# Altium PCB PCB2.PcbDoc
Units mil, origin at the board's own origin, x right, y up, seen from the top; angles counter-clockwise.
Board outline 6000 x 4000 mil, 2 copper layers (Top Layer, Bottom Layer); 219 components, 57 nets, 641 pads, 0 vias.
Unrouted connection lines stored in the file: 389.
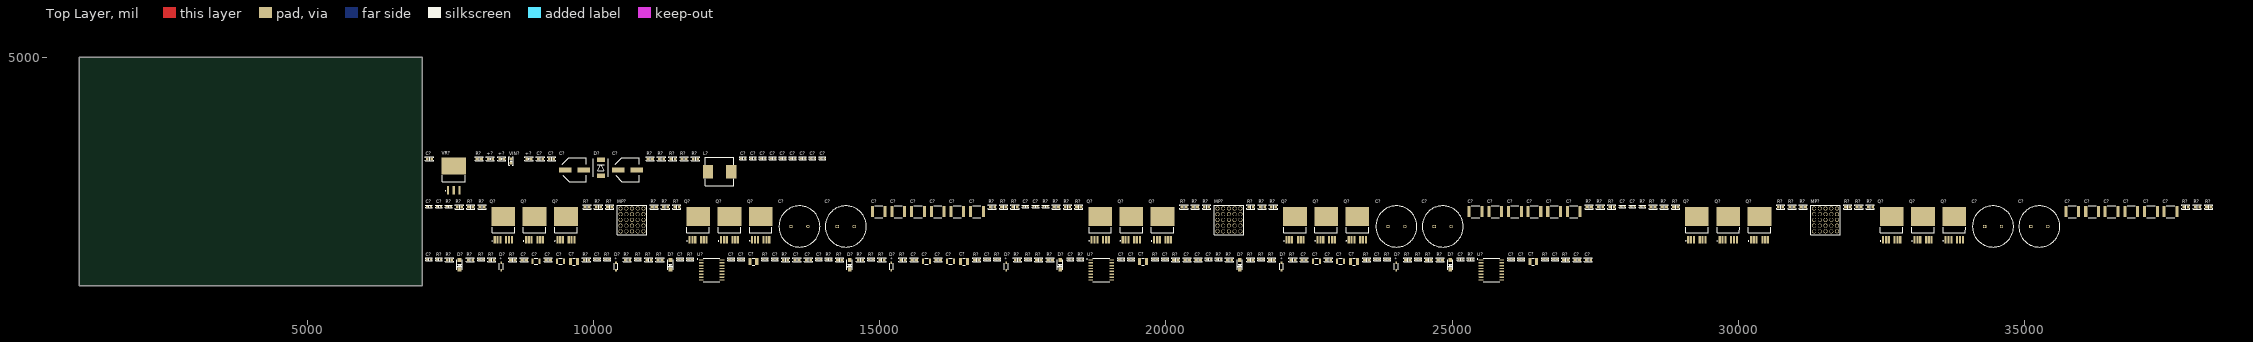
[diagram p0: Top Layer view]
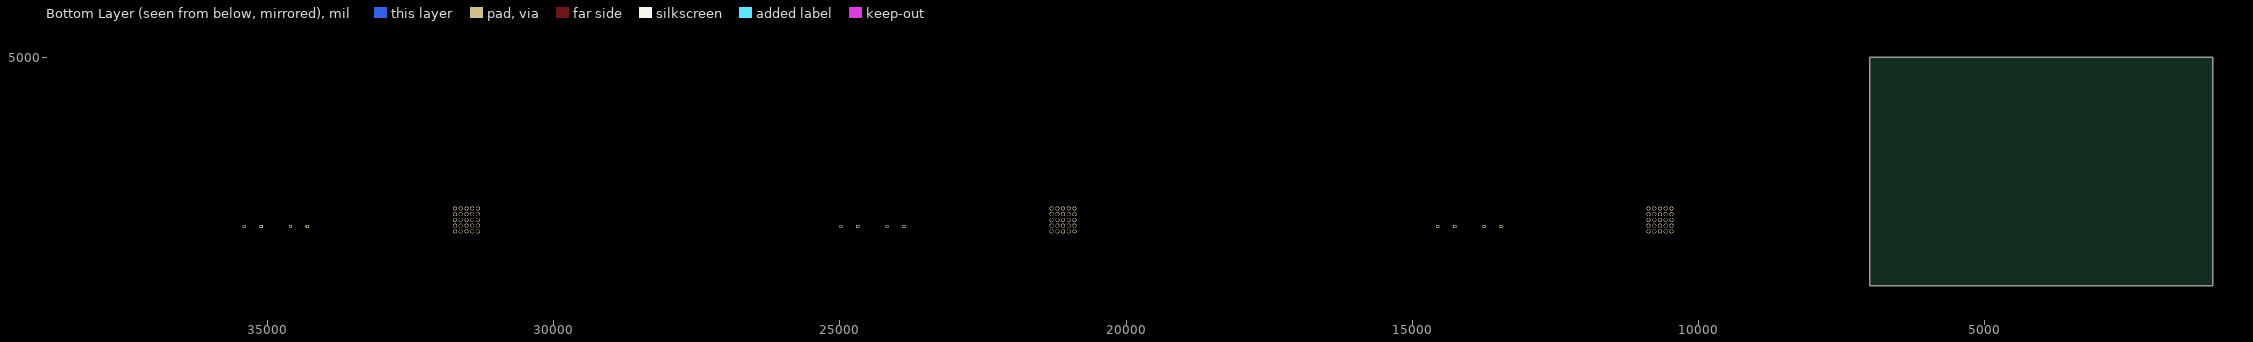
[diagram p1: Bottom Layer view, seen from below]

## Layer stack, top to bottom
Top Solder: solder mask 0.4, Solder Resist, Dk 3.5
Top Layer: signal copper 1.4
Dielectric 1: dielectric 12.6, FR-4, Dk 4.8
Bottom Layer: signal copper 1.4
Bottom Solder: solder mask 0.4, Solder Resist, Dk 3.5

## Board outline
1000,1000 7000,1000 7000,5000 1000,5000

## Design rules (kind name [scope] priority, off if disabled: settings)
Clearance [All] p1: gap=10 ignorepadtopadclearanceinfootprint=FALSE
PolygonConnect [All] p1: connectstyle=Relief reliefconductorwidth=10 reliefentries=4 polygonreliefangle="90 Angle" airgapwidth=10
RoutingVias [All] p1: holewidth=28 width=50 viastyle="Through Hole" minholewidth=28 minwidth=50 maxholewidth=28 maxwidth=50
SolderMaskExpansion [All] p1: expansion=4 istentingtop=FALSE
SupplyNets "Schematic Supply Nets" [InNet('GND')] p1: voltage=0.000
Width [All] p1: maxlimit=10 minlimit=10 preferedwidth=10
30 further rules are at their usual default settings.

## Classes and differential pairs
component class Regulators: +? C? D? L? R? U? VIN? VR?
component class Power: C? IC? MP? Q? R?
component class Driver: C? D? R? U?

## Components (designator, comment, footprint, x,y, rotation, side; value= is the part's Value field where it differs from the comment)
+? "Green" 0805LED 8190,3220 r0 top
+? "Green" 0805LED 8390,3220 r0 top
+? "Green" 0805LED 8865,3220 r0 top
C? "220nF 50V" 0805_CAP 22840,1455 r0 top value="100nF 16V"
C? "10uF Tantalum" CAPPC3528X210N 23285,1425 r0 top
C? "1uF 50V" 0805_CAP 27190,1455 r0 top value="100nF 16V"
C? "1uF 50V" 0603_CAP 19390,1465 r0 top value="1uF 16V"
C? "100nF 50V" 0805_CAP 13750,1455 r0 top value="100nF 16V"
C? "10uF 50V" WCAP-CSGP_1210_L3.2W2.5H0.95 23050,1430 r0 top
C? "1uF Tantalum" CAPPC3528X210N 19600,1425 r0 top
C? "100nF 50V" 0603_CAP 19220,1465 r0 top value="1uF 16V"
C? "100nF 50V" 0603_CAP 26035,1465 r0 top value="1uF 16V"
C? "10uF 50V" WCAP-CSGP_1210_L3.2W2.5H0.95 8990,1430 r0 top
C? "1uF 50V" 0805_CAP 13550,1455 r0 top value="100nF 16V"
C? "1uF 50V" 0603_CAP 12575,1465 r0 top value="1uF 16V"
C? "220nF 50V" 0805_CAP 9200,1455 r0 top value="100nF 16V"
C? "220pF 50V" 0603_CAP 23695,1465 r0 top value="1uF 16V"
C? "4.7uF" WCAP-CSGP_2220_L5.7W5H2.8 26100,2300 r0 top
C? "4.7uF" WCAP-CSGP_2220_L5.7W5H2.8 16695,2300 r0 top
C? "1uF Tantalum" CAPPC3528X210N 26420,1425 r0 top
C? "10uF 50V" WCAP-CSGP_1210_L3.2W2.5H0.95 15810,1430 r0 top
C? "100nF 50V" 0805_CAP 8780,1455 r0 top value="100nF 16V"
C? "2200pF 50V" 0603_CAP 18330,1465 r0 top value="1uF 16V"
C? "10uF 50V" WCAP-CSGP_1210_L3.2W2.5H0.95 16230,1430 r0 top
C? "100nF 50V" 0805_CAP 15600,1455 r0 top value="100nF 16V"
C? "1uF Tantalum" CAPPC3528X210N 12785,1425 r0 top
C? "10uF 50V" WCAP-CSGP_1210_L3.2W2.5H0.95 9415,1430 r0 top
C? "10uF Tantalum" CAPPC3528X210N 16470,1425 r0 top
C? "100nF 50V" 0805_CAP 20565,1455 r0 top value="100nF 16V"
C? "220pF 50V" 0603_CAP 13165,1465 r0 top value="1uF 16V"
C? "220nF 50V" 0805_CAP 16020,1455 r0 top value="100nF 16V"
C? "100nF 50V" 0603_CAP 12400,1465 r0 top value="1uF 16V"
C? "100nF 50V" 0805_CAP 27385,1455 r0 top value="100nF 16V"
C? "2200pF 50V" 0603_CAP 11510,1465 r0 top value="1uF 16V"
C? "100nF 50V" 0805_CAP 22415,1455 r0 top value="100nF 16V"
C? "220pF 50V" 0603_CAP 20750,1465 r0 top value="1uF 16V"
C? "220pF 50V" 0603_CAP 13935,1465 r0 top value="1uF 16V"
C? "2200pF 50V" 0603_CAP 25150,1465 r0 top value="1uF 16V"
C? "1uF 50V" 0805_CAP 20370,1455 r0 top value="100nF 16V"
C? "220pF 50V" 0603_CAP 26805,1465 r0 top value="1uF 16V"
C? "220pF 50V" 0603_CAP 7115,1465 r0 top value="1uF 16V"
C? "1uF 50V" 0603_CAP 26210,1465 r0 top value="1uF 16V"
C? "220pF 50V" 0603_CAP 10055,1465 r0 top value="1uF 16V"
C? "220pF 50V" 0603_CAP 19985,1465 r0 top value="1uF 16V"
C? "10uF Tantalum" CAPPC3528X210N 9650,1425 r0 top
C? "220pF 50V" 0603_CAP 16875,1465 r0 top value="1uF 16V"
C? "10uF 50V" WCAP-CSGP_1210_L3.2W2.5H0.95 22630,1430 r0 top
C? "100nF 100V" 0805_CAP 9260,3220 r0 top value="100nF 25V"
C? "470uF 100V" CAPAE1030X1060N 9660,3030 r0 top
C? "10uF 25V" 0603_CAP 13995,3230 r0 top value="1uF 16V"
C? "10uF 25V" 0603_CAP 13125,3230 r0 top value="1uF 16V"
C? "100nF 25V" 0603_CAP 12780,3230 r0 top value="1uF 16V"
C? "470uF 200V" CAPPRD750W80D1825H4150 23880,2040 r0 top
C? "4.7uF" WCAP-CSGP_2220_L5.7W5H2.8 16350,2300 r0 top
C? "4.7uF" WCAP-CSGP_2220_L5.7W5H2.8 36530,2300 r0 top
C? "1uF 16V" 0603_CAP 7290,2390 r0 top
C? "470uF 200V" CAPPRD750W80D1825H4150 24690,2040 r0 top
C? "470uF 200V" CAPPRD750W80D1825H4150 34310,2040 r0 top
C? "100nF 25V" 0603_CAP 12950,3230 r0 top value="1uF 16V"
C? "220uF 50V" CAPAE1030X1060N 10585,3030 r0 top
C? "10uF 25V" 0603_CAP 13820,3230 r0 top value="1uF 16V"
C? "10uF 25V" 0603_CAP 13300,3230 r0 top value="1uF 16V"
C? "100nF 25V" 0603_CAP 12605,3230 r0 top value="1uF 16V"
C? "100nF 25V" 0805_CAP 7125,3220 r0 top
C? "680pF 25V" 0805_CAP 9065,3220 r0 top
C? "10uF 25V" 0603_CAP 13475,3230 r0 top value="1uF 16V"
C? "10uF 25V" 0603_CAP 13650,3230 r0 top value="1uF 16V"
C? "4.7uF" WCAP-CSGP_2220_L5.7W5H2.8 16010,2300 r0 top
C? "4.7uF" WCAP-CSGP_2220_L5.7W5H2.8 15665,2300 r0 top
C? "470uF 200V" CAPPRD750W80D1825H4150 13445,2040 r0 top
C? "4.7uF" WCAP-CSGP_2220_L5.7W5H2.8 26785,2300 r0 top
C? "100nF 25V" 0603_CAP 27980,2390 r0 top value="1uF 16V"
C? "4.7uF" WCAP-CSGP_2220_L5.7W5H2.8 35845,2300 r0 top
C? "4.7uF" WCAP-CSGP_2220_L5.7W5H2.8 27130,2300 r0 top
C? "1uF 16V" 0603_CAP 17720,2390 r0 top
C? "4.7uF" WCAP-CSGP_2220_L5.7W5H2.8 36875,2300 r0 top
C? "4.7uF" WCAP-CSGP_2220_L5.7W5H2.8 37560,2300 r0 top
C? "100nF 25V" 0603_CAP 17545,2390 r0 top value="1uF 16V"
C? "4.7uF" WCAP-CSGP_2220_L5.7W5H2.8 36190,2300 r0 top
C? "4.7uF" WCAP-CSGP_2220_L5.7W5H2.8 37220,2300 r0 top
C? "100nF 25V" 0603_CAP 7115,2390 r0 top value="1uF 16V"
C? "4.7uF" WCAP-CSGP_2220_L5.7W5H2.8 15320,2300 r0 top
C? "4.7uF" WCAP-CSGP_2220_L5.7W5H2.8 25410,2300 r0 top
C? "4.7uF" WCAP-CSGP_2220_L5.7W5H2.8 14980,2300 r0 top
C? "4.7uF" WCAP-CSGP_2220_L5.7W5H2.8 26440,2300 r0 top
C? "470uF 200V" CAPPRD750W80D1825H4150 14255,2040 r0 top
C? "4.7uF" WCAP-CSGP_2220_L5.7W5H2.8 25755,2300 r0 top
C? "1uF 16V" 0603_CAP 28155,2390 r0 top
C? "470uF 200V" CAPPRD750W80D1825H4150 35120,2040 r0 top
D? "SS14" SOD3715X145N 15200,1340 r90 top
D? "B0530W-7-F" DO-214AC 21290,1370 r90 top
D? "SS14" SOD3715X145N 17205,1340 r90 top
D? "SS14" SOD3715X145N 8380,1340 r90 top
D? "SS14" SOD3715X145N 10385,1340 r90 top
D? "B0530W-7-F" DO-214AC 7650,1370 r90 top
D? "B0530W-7-F" DO-214AC 24970,1370 r90 top
D? "B0530W-7-F" DO-214AC 18150,1370 r90 top
D? "SS36-HT" DO-214AB 10120,3065 r90 top
D? "B0530W-7-F" DO-214AC 11335,1370 r90 top
D? "SS14" SOD3715X145N 22020,1340 r90 top
D? "SS14" SOD3715X145N 24025,1340 r90 top
D? "B0530W-7-F" DO-214AC 14470,1370 r90 top
L? "47uH 2A" "BOURNS SRR1280" 12195,3000 r0 top
MP? "M6 x 10mm" "7461098_chemical surface" 21100,2155 r0 top
MP? "M6 x 10mm" "7461098_chemical surface" 10665,2155 r0 top
MP? "M6 x 10mm" "7461098_chemical surface" 31530,2155 r0 top
Q? "FDB0260N1007L" FDB0260N1007L 29830,2010 r0 top
Q? "FDB0260N1007L" FDB0260N1007L 12370,2010 r0 top
Q? "FDB0260N1007L" FDB0260N1007L 30375,2010 r0 top
Q? "FDB0260N1007L" FDB0260N1007L 8415,2010 r0 top
Q? "FDB0260N1007L" FDB0260N1007L 32685,2010 r0 top
Q? "FDB0260N1007L" FDB0260N1007L 29280,2010 r0 top
Q? "FDB0260N1007L" FDB0260N1007L 19940,2010 r0 top
Q? "FDB0260N1007L" FDB0260N1007L 19395,2010 r0 top
Q? "FDB0260N1007L" FDB0260N1007L 12915,2010 r0 top
Q? "FDB0260N1007L" FDB0260N1007L 11820,2010 r0 top
Q? "FDB0260N1007L" FDB0260N1007L 22800,2010 r0 top
Q? "FDB0260N1007L" FDB0260N1007L 22255,2010 r0 top
Q? "FDB0260N1007L" FDB0260N1007L 18850,2010 r0 top
Q? "FDB0260N1007L" FDB0260N1007L 8960,2010 r0 top
Q? "FDB0260N1007L" FDB0260N1007L 23345,2010 r0 top
Q? "FDB0260N1007L" FDB0260N1007L 9510,2010 r0 top
Q? "FDB0260N1007L" FDB0260N1007L 33235,2010 r0 top
Q? "FDB0260N1007L" FDB0260N1007L 33780,2010 r0 top
R? "51 Ohms" 0603_RES 8030,1465 r0 top
R? "10k Ohms" 0603_RES 10230,1465 r0 top
R? "10k Ohms" 0805_RES 11155,1455 r0 top value="1k Ohms"
R? "109 Ohms" 0805_RES 10960,1455 r0 top value="1k Ohms"
R? "51 Ohms" 0603_RES 10770,1465 r0 top
R? "10k Ohms" 0603_RES 25325,1465 r0 top
R? "10k Ohms" 0603_RES 20925,1465 r0 top
R? "10k Ohms" 0603_RES 18505,1465 r0 top
R? "51 Ohms" 0603_RES 19810,1465 r0 top
R? "10k Ohms" 0805_RES 24795,1455 r0 top value="1k Ohms"
R? "0 Ohms" 0805_RES 14660,1455 r0 top value="1k Ohms"
R? "76.5 Ohms" 0805_RES 24225,1455 r0 top value="1k Ohms"
R? "109 Ohms" 0805_RES 9870,1455 r0 top value="1k Ohms"
R? "109 Ohms" 0805_RES 17775,1455 r0 top value="1k Ohms"
R? "10k Ohms" 0603_RES 11685,1465 r0 top
R? "3 Ohms" 0805_RES 20710,2380 r0 top value="1k Ohms"
R? "0 Ohms" 0805_RES 7475,1455 r0 top value="1k Ohms"
R? "76.5 Ohms" 0805_RES 8580,1455 r0 top value="1k Ohms"
R? "10k Ohms" 0805_RES 15035,1455 r0 top value="1k Ohms"
R? "51 Ohms" 0603_RES 17590,1465 r0 top
R? "2 Ohms" 0805_RES 20170,1455 r0 top value="1k Ohms"
R? "10k Ohms" 0805_RES 17975,1455 r0 top value="1k Ohms"
R? "51 Ohms" 0603_RES 21665,1465 r0 top
R? "76.5 Ohms" 0805_RES 17405,1455 r0 top value="1k Ohms"
R? "51 Ohms" 0603_RES 14845,1465 r0 top
R? "0 Ohms" 0805_RES 14295,1455 r0 top value="1k Ohms"
R? "10k Ohms" 0805_RES 8215,1455 r0 top value="1k Ohms"
R? "76.5 Ohms" 0805_RES 22220,1455 r0 top value="1k Ohms"
R? "10k Ohms" 0805_RES 21850,1455 r0 top value="1k Ohms"
R? "109 Ohms" 0805_RES 16690,1455 r0 top value="1k Ohms"
R? "51 Ohms" 0603_RES 12990,1465 r0 top
R? "109 Ohms" 0805_RES 24595,1455 r0 top value="1k Ohms"
R? "76.5 Ohms" 0805_RES 15400,1455 r0 top value="1k Ohms"
R? "10k Ohms" 0603_RES 23870,1465 r0 top
R? "2 Ohms" 0805_RES 26990,1455 r0 top value="1k Ohms"
R? "10k Ohms" 0603_RES 17050,1465 r0 top
R? "0 Ohms" 0805_RES 21480,1455 r0 top value="1k Ohms"
R? "51 Ohms" 0603_RES 24410,1465 r0 top
R? "10k Ohms" 0603_RES 14105,1465 r0 top
R? "0 Ohms" 0805_RES 21110,1455 r0 top value="1k Ohms"
R? "10k Ohms" 0603_RES 7290,1465 r0 top
R? "0 Ohms" 0805_RES 7840,1455 r0 top value="1k Ohms"
R? "76.5 Ohms" 0805_RES 10585,1455 r0 top value="1k Ohms"
R? "109 Ohms" 0805_RES 23510,1455 r0 top value="1k Ohms"
R? "51 Ohms" 0603_RES 26630,1465 r0 top
R? "2 Ohms" 0805_RES 13350,1455 r0 top value="1k Ohms"
R? "3 Ohms" 0805_RES 7650,2380 r0 top value="1k Ohms"
R? "3 Ohms" 0805_RES 27595,2380 r0 top value="1k Ohms"
R? "3 Ohms" 0805_RES 10275,2380 r0 top value="1k Ohms"
R? "3 Ohms" 0805_RES 11250,2380 r0 top value="1k Ohms"
R? "3 Ohms" 0805_RES 20510,2380 r0 top value="1k Ohms"
R? "3 Ohms" 0805_RES 11450,2380 r0 top value="1k Ohms"
R? "3 Ohms" 0805_RES 28515,2380 r0 top value="1k Ohms"
R? "3 Ohms" 0805_RES 21485,2380 r0 top value="1k Ohms"
R? "3 Ohms" 0805_RES 37830,2380 r0 top value="1k Ohms"
R? "3 Ohms" 0805_RES 31920,2380 r0 top value="1k Ohms"
R? "3 Ohms" 0805_RES 18475,2380 r0 top value="1k Ohms"
R? "1k Ohms" 0603_RES 17895,2390 r0 top
R? "20K Ohms" 0805_RES 11775,3220 r0 top
R? "1k Ohms" 0805_RES 7995,3220 r0 top
R? "2k2 Ohms" 0805_RES 11180,3220 r0 top
R? "10K Ohms" 0805_RES 11380,3220 r0 top
R? "3 Ohms" 0805_RES 17360,2380 r0 top value="1k Ohms"
R? "3 Ohms" 0805_RES 27795,2380 r0 top value="1k Ohms"
R? "1k Ohms" 0603_RES 28330,2390 r0 top
R? "11k Ohms" 0805_RES 10985,3220 r0 top
R? "22K Ohms" 0805_RES 11575,3220 r0 top
R? "3 Ohms" 0805_RES 38230,2380 r0 top value="1k Ohms"
R? "3 Ohms" 0805_RES 11055,2380 r0 top value="1k Ohms"
R? "3 Ohms" 0805_RES 32315,2380 r0 top value="1k Ohms"
R? "1k Ohms" 0603_RES 7460,2390 r0 top
R? "3 Ohms" 0805_RES 10080,2380 r0 top value="1k Ohms"
R? "3 Ohms" 0805_RES 9880,2380 r0 top value="1k Ohms"
R? "3 Ohms" 0805_RES 30945,2380 r0 top value="1k Ohms"
R? "3 Ohms" 0805_RES 28910,2380 r0 top value="1k Ohms"
R? "3 Ohms" 0805_RES 8045,2380 r0 top value="1k Ohms"
R? "3 Ohms" 0805_RES 18280,2380 r0 top value="1k Ohms"
R? "3 Ohms" 0805_RES 7845,2380 r0 top value="1k Ohms"
R? "3 Ohms" 0805_RES 27400,2380 r0 top value="1k Ohms"
R? "3 Ohms" 0805_RES 18080,2380 r0 top value="1k Ohms"
R? "3 Ohms" 0805_RES 20315,2380 r0 top value="1k Ohms"
R? "3 Ohms" 0805_RES 38030,2380 r0 top value="1k Ohms"
R? "3 Ohms" 0805_RES 17165,2380 r0 top value="1k Ohms"
R? "3 Ohms" 0805_RES 16965,2380 r0 top value="1k Ohms"
R? "3 Ohms" 0805_RES 21880,2380 r0 top value="1k Ohms"
R? "3 Ohms" 0805_RES 31140,2380 r0 top value="1k Ohms"
R? "3 Ohms" 0805_RES 21685,2380 r0 top value="1k Ohms"
R? "3 Ohms" 0805_RES 32115,2380 r0 top value="1k Ohms"
R? "3 Ohms" 0805_RES 30745,2380 r0 top value="1k Ohms"
R? "3 Ohms" 0805_RES 28710,2380 r0 top value="1k Ohms"
U? "UCC21520DWR" SOIC127P1030X265-16N 25690,1280 r0 top
U? "UCC21520DWR" SOIC127P1030X265-16N 18870,1280 r0 top
U? "UCC21520DWR" SOIC127P1030X265-16N 12055,1280 r0 top
VIN? "Green" 0805LED 8550,3185 r90 top
VR? "TL783" TL783 7450,2670 r0 top

## Footprints (in the part's own frame and the unit in brackets; to place one, negate y for a bottom-side part, rotate by r counter-clockwise, add the part's x,y. Pads: shape width x height; smd on the part's side, far side on the other; paste and mask are expansions set on the pad)
0603_CAP [mm]
  rect 1x0.95 smd mask+0.08: 1(-0.889,0) 2(0.889,0)
  silkscreen extent -1.52,-0.64 1.52,0.64, body extent -0.8,-0.4 0.8,0.4, height 0.96
0603_RES [mm]
  rect 1x0.95 smd mask+0.08: 1(-0.889,0) 2(0.889,0)
  silkscreen extent -1.52,-0.64 1.52,0.64, body extent -0.85,-0.4 0.85,0.4, height 0.56
0805_CAP [mm]
  rect 1.2x1.4 smd: 1(-1,0) 2(1,0)
  silkscreen extent -1.8,-0.9 1.8,0.9, body extent -1,-0.62 1,0.63, height 0.6
0805_RES [mm]
  rect 1.2x1.4 smd: 1(-1,0) 2(1,0)
  silkscreen extent -1.8,-0.9 1.8,0.9, body extent -1,-0.62 1,0.63, height 0.6
0805LED [mm]
  rect 1.2x1.4 smd: 1(-1,0) 2(1,0)
  silkscreen extent -1.8,-0.9 1.8,0.9, body extent -1.01,-0.62 1.01,0.63, height 1.1
"7461098_chemical surface" [mm] "M6, thread 10mm"
  round 1.8 hole 1.475: 1(-5.08,-5.08) 1(-5.08,-2.54) 1(-5.08,0) 1(-5.08,2.54) 1(-5.08,5.08) 1(-2.54,-5.08) 1(-2.54,-2.54) 1(-2.54,0) 1(-2.54,2.54) 1(-2.54,5.08) 1(0,-5.08) 1(0,-2.54) 1(0,0) 1(0,2.54) 1(0,5.08) 1(2.54,-5.08) 1(2.54,-2.54) 1(2.54,0) 1(2.54,2.54) 1(2.54,5.08) 1(5.08,-5.08) 1(5.08,-2.54) 1(5.08,0) 1(5.08,2.54) 1(5.08,5.08)
  silkscreen extent -6.5,-6.5 6.5,6.5, body extent -6.5,-6.5 6.5,6.5, height 15.5
"BOURNS SRR1280" [mm]
  rect 4.5x6 smd: 1(-5.2,0) 2(5.2,0)
  silkscreen extent -6.4,-6.4 6.4,6.4, body extent -6.25,-6.25 6.25,6.25, height 7.9
CAPAE1030X1060N [mm]
  rect 5.5x2.2 smd: 1(-4.15,0) 2(4.15,0)
  silkscreen extent -5.4,-5.3 5.3,5.3, body extent -5.6,-5.25 5.6,5.25, height 10.6
CAPPC3528X210N [mm]
  rect 1.34x3.02 smd: 1(-1.54,0) 2(1.54,0)
  silkscreen extent -0.55,-1.5 0.55,1.5
CAPPRD750W80D1825H4150 [mm]
  rect 1.5x1.5 / inner round 1.5 / far side rect 1.5x1.5 hole 1: 1(0,0)
  round 1.5 hole 1: 2(7.5,0)
  silkscreen extent -5.37,-9.12 12.88,9.12
DO-214AB [mm]
  rect 2x3.5 smd mask+0.05: 1(-3.6,0) 2(3.6,0)
  silkscreen extent -4,-3.3 4,3.3, body extent -3.95,-2.9 3.95,2.9, height 2.5
DO-214AC [mm]
  rect 1.8x1.7 smd: A(2.05,0) K(-2.05,0)
  silkscreen extent -2.3,-1.2 2.3,1.2, body extent -2.6,-1.36 2.6,1.36, height 2.5
FDB0260N1007L [mm]
  rect 0.95x3.45 smd: 1(-3.81,-5.1) 2(-2.54,-5.1) 3(-1.27,-5.1) 5(1.27,-5.1) 6(2.54,-5.1) 7(3.81,-5.1)
  rect 10.5x8.4 smd: 4(0,5.1)
  silkscreen extent -5,-5.7 5,0.4
SOD3715X145N [mm]
  rect 1.21x0.72 smd: A(1.68,0) C(-1.68,0)
  silkscreen extent -1.35,-0.85 1.35,0.85
SOIC127P1030X265-16N [mm]
  rrect25% 2.06x0.6 smd: 1(-4.64,4.445) 2(-4.64,3.175) 3(-4.64,1.905) 4(-4.64,0.635) 5(-4.64,-0.635) 6(-4.64,-1.905) 7(-4.64,-3.175) 8(-4.64,-4.445) 9(4.64,-4.445) 10(4.64,-3.175) 11(4.64,-1.905) 12(4.64,-0.635) 13(4.64,0.635) 14(4.64,1.905) 15(4.64,3.175) 16(4.64,4.445)
  silkscreen extent -6.4,-5.15 3.75,5.15, body extent -5.15,-5.15 5.15,5.15, height 2.65
TL783 [mm]
  rect 0.99x3.79 smd: 1(0,0) 2(2.54,0) 3(5.08,0)
  rect 10.84x7.62 smd paste-6: 4(2.54,10.88)
  silkscreen extent -2.54,-0.24 7.62,6.76, body extent -2.54,-0.71 7.62,14.53, height 4.83
WCAP-CSGP_1210_L3.2W2.5H0.95 [mm] "Ceramic Capacitors, body 3.2x2.5mm"
  rect 0.9x2.5 smd: 1(-1.55,0) 2(1.55,0)
  silkscreen extent -0.8,-1.35 0.8,1.35, body extent -1.6,-1.25 1.6,1.25, height 0.95
WCAP-CSGP_2220_L5.7W5H2.8 [mm] "Ceramic Capacitors, body 5.70x5.00mm"
  rect 1.35x5 smd: 1(-2.825,0) 2(2.825,0)
  silkscreen extent -1.8,-2.7 1.8,2.7, body extent -2.85,-2.5 2.85,2.5, height 2.8

## Part data
+? +? +? VIN?: library part LED, "0805"
C? C? C? C? C? C? C? C? C? C? C? C? C? C? C?: library part CAP_0805
C? C? C? C? C? C?: library part T495B106K025ATE750, "10ÂµF Molded Tantalum Capacitors 25V 1411 (3528 Metric) 750mOhm @ 100kHz", Package="1411 KEMET", Availability=Unavailable, MF=KEMET, MP=T495B106K025ATE750, Price=None, SnapEDA_Link=https://www.snapeda.com/parts/T495B106K025ATE750/KEMET/view-part/1680496/?ref=snap
C? C? C? C? C? C? C? C? C? C? C? C? C? C? C? C? C? C? C? C? C? C? C? C? C? C? C? C? C? C? C? C? C?: library part CAP_0603, "CL10B105KO8NNNC - MLCC (1608) 0603 1uF 16VDC ±10% X7R"
C? C? C? C? C? C?: library part 885012009019, "WCAP-CSGP Multilayer Ceramic Chip Capacitor, General Purpose, size 1210, NP0, 2.2nF, 50V", Capacitance=2.2nF, Capacitance Tolerance=+/-5%, Case/Size Code=1210, manufacturer="Wurth Elektronik", Max Operating Temperature=125°C, Min Operating Temperature=-55°C, Rated Voltage (DC)=50V, Insulation Resistance=10GΩ, Category="Multilayer Ceramic Chip Capacitors", Ceramic Type=NP0, ComponentLink1Description="Website Link", ComponentLink1URL=https://www.we-online.com/redexpert/article/885012009019?ad, ComponentLink2Description="Datasheet Link", ComponentLink2URL=https://www.we-online.com/redexpert/spec/885012009019?ad, Height=0.95mm, Length=3.2mm, Manufacturer Part Number=885012009019, Match Code=WCAP-CSGP, Mount="Surface Mount", packaging="Tape and Reel", Q Factor=1000, Technical Reference=NP01210222J050DFCT10000, Width=2.5mm
C? C? C? C? C? C? C? C? C? C? C? C? C? C? C? C? C? C?: library part 885012214001, "WCAP-CSGP Multilayer Ceramic Chip Capacitor, General Purpose, size 2220, X7R Class II, 10μF, 100V", Capacitance=10μF, Capacitance Tolerance=+/-20%, Case/Size Code=2220, manufacturer="Wurth Elektronik", Max Operating Temperature=125°C, Min Operating Temperature=-55°C, Rated Voltage (DC)=100V, Insulation Resistance=0.01GΩ, Category="Multilayer Ceramic Chip Capacitors", Ceramic Type="X7R Class II", ComponentLink1Description="Website Link", ComponentLink1URL=https://www.we-online.com/redexpert/article/885012214001?ad, ComponentLink2Description="Datasheet Link", ComponentLink2URL=https://www.we-online.com/redexpert/spec/885012214001?ad, Dissipation Factor=2.5%, Height=2.8mm, Length=5.7mm, Manufacturer Part Number=885012214001, Match Code=WCAP-CSGP, Mount="Surface Mount", packaging="Tape and Reel", Technical Reference=X7R2220106M100DFCT10000, Width=5mm
C? C?: library part CK1H221M-CRG10, "Capacitor Polarised", Manufacturer_Name=SEMTECH, Datasheet Link=https://datasheet.lcsc.com/szlcsc/1810281207_ST-Semtech-CK1H221M-CRG10_C131159.pdf, Height=10.6mm, Manufacturer_Part_Number=CK1H221M-CRG10
C? C? C? C? C? C?: library part UCY2D471MHD, "Aluminum Electrolytic Capacitors - Radial Leaded 470uF 200 Volts 20% AEC-Q200", Manufacturer_Name=Nichicon, Mouser Part Number=647-UCY2D471MHD, Datasheet Link=https://www.mouser.in/datasheet/2/293/e_ucy-1511878.pdf, Geometry.Height=41.5mm, Manufacturer_Part_Number=UCY2D471MHD, Mouser Price/Stock=https://www.mouser.co.uk/ProductDetail/Nichicon/UCY2D471MHD?qs=lub5aoyU9qCCB7JKpUdfUQ%3D%3D
D? D? D? D? D? D?: library part B0530W-7-F, "Diode Schottky 30V 500mA Surface Mount SOD-123", Package="SOD-123 Diodes Inc.", Availability=Unavailable, MF="Diodes Inc.", MP=B0530W-7-F, Price=None, SnapEDA_Link=https://www.snapeda.com/parts/B0530W-7-F/Diodes%20Inc./view-part/272168/?ref=snap
D? D? D? D? D? D?: library part SS14, "Diode Schottky 40 V 1A Surface Mount DO-214AC (SMA)", Package="SMA-2 ON Semiconductor", Check_prices=https://www.snapeda.com/parts/SS14/Onsemi/view-part/?ref=eda, MF="ON Semiconductor", MP=SS14, SnapEDA_Link=https://www.snapeda.com/parts/SS14/Onsemi/view-part/?ref=snap
D?: library part SS36-214AB-HT, "Schottky Diode", ComponentLink1Description=Özdisan, ComponentLink1URL=https://ozdisan.com/guc-yari-iletkenleri/diyotlar-modul-diyotlar-ve-dogrultucular/schottky-diyotlar/SS36-214AB-HT/475999, ComponentLink2Description=Datasheet, ComponentLink2URL=https://cdn.ozdisan.com/ETicaret_Dosya/475999_7494647.pdf, PartNumber=SS36-HT
L?: library part Inductor, "FIXED IND 47UH 2.9A 80 MOHM SMD"
MP? MP? MP?: library part 7461098, "WP-SHFU REDCUBE PRESS-FIT with external thread, L13W13H15.5mm, M6 x 10mm, 250A", manufacturer="Wurth Elektronik", Operating Temperature Max=150°C, Operating Temperature Min=-55°C, Rated Current=250A, Category="REDCUBE PRESS-FIT", ComponentLink1Description="Website Link", ComponentLink1URL=https://www.we-online.com/redexpert/article/7461098?ad, ComponentLink2Description="Datasheet Link", ComponentLink2URL=https://www.we-online.com/redexpert/spec/7461098?ad, Height=15.5mm, Length=13mm, Manufacturer Part Number=7461098, Match Code=WP-SHFU, Material=Brass, Mount="Press Fit", Number of Pins=25, packaging=Bulk, Surface=Tin, Thread Length=10mm, Thread Size=M6, Width=13mm
Q? Q? Q? Q? Q? Q? Q? Q? Q? Q? Q? Q? Q? Q? Q? Q? Q? Q?: "MOSFET 100V TO263 7L JEDEC GREEN EMC", Manufacturer_Name=onsemi, Mouser Part Number=512-FDB0260N1007L, Arrow Part Number=FDB0260N1007L, Arrow Price/Stock=https://www.arrow.com/en/products/fdb0260n1007l/on-semiconductor, Datasheet Link=https://componentsearchengine.com/Datasheets/2/FDB0260N1007L.pdf, Geometry.Height=4.7mm, Manufacturer_Part_Number=FDB0260N1007L, Mouser Price/Stock=https://www.mouser.co.uk/ProductDetail/ON-Semiconductor-Fairchild/FDB0260N1007L?qs=lDZPRidwxxtoCZGWdM7x%2FA%3D%3D
R? R? R? R? R? R? R? R? R? R? R? R? R? R? R? R? R? R?: library part "1k Ohms"
R? R? R? R? R? R? R? R? R? R? R? R? R? R? R? R? R? R? R? R? R? R? R? R? R? R? R? R? R? R? R? R? R? R? R? R? R? R? R? R? R? R? R? R? R? R? R? R? R? R? R? R? R? R? R? R? R? R? R? R? R? R? R? R? R? R? R? R? R?: library part RES_0805, "0805", Power="1/8 W"
U? U? U?: "5.7kVrms, 4A/6A dual-channel isolated gate driver w/ dual input, disable pin, 8V UVLO in DW package", Package="SOIC-16 Texas Instruments", Availability="In Stock", Check_prices=https://www.snapeda.com/parts/UCC21520DWR/Texas+Instruments/view-part/?ref=eda, MF="Texas Instruments", MP=UCC21520DWR, Price=None, Purchase-URL=https://pricing.snapeda.com/search/part/UCC21520DWR/?ref=eda, SnapEDA_Link=https://www.snapeda.com/parts/UCC21520DWR/Texas+Instruments/view-part/?ref=snap
VR?: library part TL783/SMD

## Nets (pads, with @x,y where several pads share a name; then routed paths per layer and width w, separated by ;. In a path a pad name is that pad's centre, name@x,y a point inside that pad or via, vN(x,y) a via of type N, cw(c..) or ccw(c..) an arc to the next point about the centre after c; other vN are vias at no path point)
+3.3V: C?.1@7080,2390 C?.1@17510,2390 C?.1@27945,2390
+5V: C?.1@12724.37,1425 C?.1@19539.37,1425 C?.1@26359.37,1425 C?.2@12435,1465 C?.2@12610,1465 C?.2@13160,3230 C?.2@13335,3230 C?.2@13510,3230 C?.2@13685,3230 C?.2@13855,3230 C?.2@14030,3230 C?.2@19255,1465 C?.2@19425,1465 C?.2@26070,1465 C?.2@26245,1465 R?.1@11140.63,3220 U?.3 U?.8
+12V: C?.2@13589.37,1455 C?.2@13789.37,1455 C?.2@20409.37,1455 C?.2@20604.37,1455 C?.2@27229.37,1455 C?.2@27424.37,1455 R?.2@13389.37,1455 R?.2@20209.37,1455 R?.2@27029.37,1455
+15V: C?.1@10421.61,3030 C?.2@9104.37,3220 C?.2@12640,3230 C?.2@12815,3230 C?.2@12985,3230 L?.2 R?.1@11340.63,3220 R?.2@11024.37,3220 U?.1@25507.32,1455
+45V: C?.1@9496.61,3030 C?.2@7164.37,3220 C?.2@9299.37,3220 R?.1@11735.63,3220 VR?.1 VR?.2 VR?.4
A_DIS: R?.1@26595,1465
A_IN_H: R?.1@24375,1465
A_IN_L: R?.1@21630,1465
A_VSS_H: C?.1@22568.98,1430 C?.2@22454.37,1455 D?.A@24970,1450.71 R?.1@24755.63,1455 R?.1@31880.63,2380 R?.1@32075.63,2380 R?.1@32275.63,2380 R?.2@21519.37,1455 U?.14@25872.68,1355
A_VSS_L: C?.1@22988.98,1430 C?.2@23345.63,1425 D?.A@21290,1450.71 R?.1@28475.63,2380 R?.1@28670.63,2380 R?.1@28870.63,2380 R?.2@21149.37,1455 R?.2@21889.37,1455 U?.9@25872.68,1105
B_DIS: R?.1@19775,1465
B_IN_H: R?.1@17555,1465
B_IN_L: R?.1@14810,1465
B_VSS_H: C?.1@15748.98,1430 C?.2@15639.37,1455 D?.A@18150,1450.71 R?.1@17935.63,1455 R?.1@21445.63,2380 R?.1@21645.63,2380 R?.1@21840.63,2380 R?.2@14699.37,1455 U?.14@19052.68,1355
B_VSS_L: C?.1@16168.98,1430 C?.2@16059.37,1455 C?.2@16530.63,1425 D?.A@14470,1450.71 R?.1@18040.63,2380 R?.1@18240.63,2380 R?.1@18435.63,2380 R?.2@14334.37,1455 R?.2@15074.37,1455 U?.9@19052.68,1105
C_DIS: R?.1@12955,1465
C_IN_H: R?.1@10735,1465
C_IN_L: R?.1@7995,1465
C_VSS_H: C?.1@8928.98,1430 C?.2@8819.37,1455 D?.A@11335,1450.71 R?.1@11015.63,2380 R?.1@11115.63,1455 R?.1@11210.63,2380 R?.1@11410.63,2380 R?.2@7879.37,1455 U?.14@12237.68,1355
C_VSS_L: C?.1@9353.98,1430 C?.2@9239.37,1455 C?.2@9710.63,1425 D?.A@7650,1450.71 R?.1@7610.63,2380 R?.1@7805.63,2380 R?.1@8005.63,2380 R?.2@7514.37,1455 R?.2@8254.37,1455 U?.9@12237.68,1105
GND: +?.2 C?.1@7080,1465 C?.1@7085.63,3220 C?.1@7255,2390 C?.1@9220.63,3220 C?.1@10020,1465 C?.1@12365,1465 C?.1@12540,1465 C?.1@12570,3230 C?.1@12745,3230 C?.1@12915,3230 C?.1@13090,3230 C?.1@13130,1465 C?.1@13265,3230 C?.1@13440,3230 C?.1@13445,2040 C?.1@13510.63,1455 C?.1@13615,3230 C?.1@13710.63,1455 C?.1@13785,3230 C?.1@13900,1465 C?.1@13960,3230 C?.1@14255,2040 C?.1@14868.78,2300 C?.1@15208.78,2300 C?.1@15553.78,2300 C?.1@15898.78,2300 C?.1@16238.78,2300 C?.1@16583.78,2300 C?.1@16840,1465 C?.1@17685,2390 C?.1@19185,1465 C?.1@19355,1465 C?.1@19950,1465 C?.1@20330.63,1455 C?.1@20525.63,1455 C?.1@20715,1465 C?.1@23660,1465 C?.1@23880,2040 C?.1@24690,2040 C?.1@25298.78,2300 C?.1@25643.78,2300 C?.1@25988.78,2300 C?.1@26000,1465 C?.1@26175,1465 C?.1@26328.78,2300 C?.1@26673.78,2300 C?.1@26770,1465 C?.1@27018.78,2300 C?.1@27150.63,1455 C?.1@27345.63,1455 C?.1@28120,2390 C?.1@34310,2040 C?.1@35120,2040 C?.1@35733.78,2300 C?.1@36078.78,2300 C?.1@36418.78,2300 C?.1@36763.78,2300 C?.1@37108.78,2300 C?.1@37448.78,2300 C?.2@7150,2390 C?.2@9823.39,3030 C?.2@10748.39,3030 C?.2@11545,1465 C?.2@12845.63,1425 C?.2@17580,2390 C?.2@18365,1465 C?.2@19660.63,1425 C?.2@22879.37,1455 C?.2@25185,1465 C?.2@26480.63,1425 C?.2@28015,2390 D?.1 Q?.5@8465,1809.21 Q?.5@9010,1809.21 Q?.5@9560,1809.21 Q?.5@18900,1809.21 Q?.5@19445,1809.21 Q?.5@19990,1809.21 Q?.5@29330,1809.21 Q?.5@29880,1809.21 Q?.5@30425,1809.21 Q?.6@8515,1809.21 Q?.6@9060,1809.21 Q?.6@9610,1809.21 Q?.6@18950,1809.21 Q?.6@19495,1809.21 Q?.6@20040,1809.21 Q?.6@29380,1809.21 Q?.6@29930,1809.21 Q?.6@30475,1809.21 Q?.7@8565,1809.21 Q?.7@9110,1809.21 Q?.7@9660,1809.21 Q?.7@19000,1809.21 Q?.7@19545,1809.21 Q?.7@20090,1809.21 Q?.7@29430,1809.21 Q?.7@29980,1809.21 Q?.7@30525,1809.21 R?.1@7955.63,3220 R?.2@8065,1465 R?.2@11720,1465 R?.2@18540,1465 R?.2@25360,1465 U?.2@25507.32,1405 U?.4 VIN?.2
ISO_+12_A_H: C?.1@22375.63,1455 C?.2@22691.02,1430 U?.16@25872.68,1455
ISO_+12_A_L: C?.1@23224.37,1425 C?.2@23111.02,1430 U?.11@25872.68,1205
ISO_+12_B_H: C?.1@15560.63,1455 C?.2@15871.02,1430 U?.16@19052.68,1455
ISO_+12_B_L: C?.1@15980.63,1455 C?.1@16409.37,1425 C?.2@16291.02,1430 U?.11@19052.68,1205
ISO_+12_C_H: C?.1@8740.63,1455 C?.2@9051.02,1430 U?.16@12237.68,1455
ISO_+12_C_L: C?.1@9160.63,1455 C?.1@9589.37,1425 C?.2@9476.02,1430 U?.11@12237.68,1205
ISO_-12_A_H: R?.1@21440.63,1455
ISO_-12_A_L: R?.1@21070.63,1455
ISO_-12_B_H: R?.1@14620.63,1455
ISO_-12_B_L: R?.1@14255.63,1455
ISO_-12_C_H: R?.1@7800.63,1455
ISO_-12_C_L: R?.1@7435.63,1455
Net+?_1: +?.1@8150.63,3220 R?.2@11219.37,3220
NetC?_1: C?.1@18295,1465 R?.1@18470,1465 U?.6@18687.32,1205
NetC?_2: C?.2@26840,1465 R?.2@26665,1465 U?.5@25507.32,1255
NetD?_2: R?.1@26950.63,1455
NetD?_A: D?.A@8380,1406.14 R?.1@8540.63,1455
NetD?_C: D?.C@24025,1273.86 R?.1@24555.63,1455 U?.15@25872.68,1405
NetQ?_1: Q?.1@8265,1809.21 R?.2@9919.37,2380
NetQ?_2: Q?.2@29180,1809.21 Q?.3@29230,1809.21 R?.2@28949.37,2380
NetQ?_4: Q?.4@8415,2210.79 Q?.4@8960,2210.79 Q?.4@9510,2210.79 Q?.5@11870,1809.21 Q?.5@12420,1809.21 Q?.5@12965,1809.21 Q?.6@11920,1809.21 Q?.6@12470,1809.21 Q?.6@13015,1809.21 Q?.7@11970,1809.21 Q?.7@12520,1809.21 Q?.7@13065,1809.21
NetR?_1: R?.1@7425,2390
NetR?_2: R?.2@11614.37,3220 VIN?.1
PHASE_A: MP?.1@31330,1955 MP?.1@31330,2055 MP?.1@31330,2155 MP?.1@31330,2255 MP?.1@31330,2355 MP?.1@31430,1955 MP?.1@31430,2055 MP?.1@31430,2155 MP?.1@31430,2255 MP?.1@31430,2355 MP?.1@31530,1955 MP?.1@31530,2055 MP?.1@31530,2155 MP?.1@31530,2255 MP?.1@31530,2355 MP?.1@31630,1955 MP?.1@31630,2055 MP?.1@31630,2155 MP?.1@31630,2255 MP?.1@31630,2355 MP?.1@31730,1955 MP?.1@31730,2055 MP?.1@31730,2155 MP?.1@31730,2255 MP?.1@31730,2355
Phase_A_H: D?.K@24970,1289.29 R?.1@37790.63,2380 R?.1@37990.63,2380 R?.1@38190.63,2380 R?.2@24264.37,1455 R?.2@24634.37,1455 R?.2@24834.37,1455
Phase_A_L: D?.K@21290,1289.29 R?.1@21810.63,1455 R?.1@30705.63,2380 R?.1@30905.63,2380 R?.1@31100.63,2380 R?.2@22259.37,1455 R?.2@23549.37,1455
PHASE_B: MP?.1@20900,1955 MP?.1@20900,2055 MP?.1@20900,2155 MP?.1@20900,2255 MP?.1@20900,2355 MP?.1@21000,1955 MP?.1@21000,2055 MP?.1@21000,2155 MP?.1@21000,2255 MP?.1@21000,2355 MP?.1@21100,1955 MP?.1@21100,2055 MP?.1@21100,2155 MP?.1@21100,2255 MP?.1@21100,2355 MP?.1@21200,1955 MP?.1@21200,2055 MP?.1@21200,2155 MP?.1@21200,2255 MP?.1@21200,2355 MP?.1@21300,1955 MP?.1@21300,2055 MP?.1@21300,2155 MP?.1@21300,2255 MP?.1@21300,2355
Phase_B_H: D?.K@18150,1289.29 R?.1@27360.63,2380 R?.1@27555.63,2380 R?.1@27755.63,2380 R?.2@17444.37,1455 R?.2@17814.37,1455 R?.2@18014.37,1455
Phase_B_L: D?.K@14470,1289.29 R?.1@14995.63,1455 R?.1@20275.63,2380 R?.1@20470.63,2380 R?.1@20670.63,2380 R?.2@15439.37,1455 R?.2@16729.37,1455
PHASE_C: MP?.1@10465,1955 MP?.1@10465,2055 MP?.1@10465,2155 MP?.1@10465,2255 MP?.1@10465,2355 MP?.1@10565,1955 MP?.1@10565,2055 MP?.1@10565,2155 MP?.1@10565,2255 MP?.1@10565,2355 MP?.1@10665,1955 MP?.1@10665,2055 MP?.1@10665,2155 MP?.1@10665,2255 MP?.1@10665,2355 MP?.1@10765,1955 MP?.1@10765,2055 MP?.1@10765,2155 MP?.1@10765,2255 MP?.1@10765,2355 MP?.1@10865,1955 MP?.1@10865,2055 MP?.1@10865,2155 MP?.1@10865,2255 MP?.1@10865,2355
Phase_C_H: D?.K@11335,1289.29 R?.1@9840.63,2380 R?.1@10040.63,2380 R?.1@10235.63,2380 R?.1@16925.63,2380 R?.1@17125.63,2380 R?.1@17320.63,2380 R?.2@10624.37,1455 R?.2@10999.37,1455 R?.2@11194.37,1455
Phase_C_L: D?.K@7650,1289.29 R?.1@8175.63,1455 R?.2@8619.37,1455 R?.2@9909.37,1455
PVDD: C?.1@22800.63,1455 C?.2@13740.28,2040 C?.2@14550.28,2040 C?.2@15091.22,2300 C?.2@15431.22,2300 C?.2@15776.22,2300 C?.2@16121.22,2300 C?.2@16461.22,2300 C?.2@16806.22,2300 C?.2@24175.28,2040 C?.2@24985.28,2040 C?.2@25521.22,2300 C?.2@25866.22,2300 C?.2@26211.22,2300 C?.2@26551.22,2300 C?.2@26896.22,2300 C?.2@27241.22,2300 C?.2@34605.28,2040 C?.2@35415.28,2040 C?.2@35956.22,2300 C?.2@36301.22,2300 C?.2@36641.22,2300 C?.2@36986.22,2300 C?.2@37331.22,2300 C?.2@37671.22,2300 Q?.4@11820,2210.79 Q?.4@12370,2210.79 Q?.4@12915,2210.79 Q?.4@22255,2210.79 Q?.4@22800,2210.79 Q?.4@23345,2210.79 Q?.4@32685,2210.79 Q?.4@33235,2210.79 Q?.4@33780,2210.79 R?.1@11535.63,3220 VR?.3
VIOUT1: C?.2@28190,2390 R?.2@28365,2390
VIOUT2: C?.2@17755,2390 R?.2@17930,2390
VIOUT3: C?.2@7325,2390 R?.2@7495,2390
pads on no net: +?.1@8350.63,3220 +?.1@8825.63,3220 C?.1@9025.63,3220 C?.1@11475,1465 C?.1@25115,1465 C?.2@7150,1465 C?.2@10090,1465 C?.2@13200,1465 C?.2@13970,1465 C?.2@16910,1465 C?.2@20020,1465 C?.2@20785,1465 C?.2@23730,1465 D?.2 D?.A@10385,1406.14 D?.A@15200,1406.14 D?.A@17205,1406.14 D?.A@22020,1406.14 D?.A@24025,1406.14 D?.C@8380,1273.86 D?.C@10385,1273.86 D?.C@15200,1273.86 D?.C@17205,1273.86 D?.C@22020,1273.86 L?.1 Q?.1@8810,1809.21 Q?.1@9360,1809.21 Q?.1@11670,1809.21 Q?.1@12220,1809.21 Q?.1@12765,1809.21 Q?.1@18700,1809.21 Q?.1@19245,1809.21 Q?.1@19790,1809.21 Q?.1@22105,1809.21 Q?.1@22650,1809.21 Q?.1@23195,1809.21 Q?.1@29130,1809.21 Q?.1@29680,1809.21 Q?.1@30225,1809.21 Q?.1@32535,1809.21 Q?.1@33085,1809.21 Q?.1@33630,1809.21 Q?.2@8315,1809.21 Q?.2@8860,1809.21 Q?.2@9410,1809.21 Q?.2@11720,1809.21 Q?.2@12270,1809.21 Q?.2@12815,1809.21 Q?.2@18750,1809.21 Q?.2@19295,1809.21 Q?.2@19840,1809.21 Q?.2@22155,1809.21 Q?.2@22700,1809.21 Q?.2@23245,1809.21 Q?.2@29730,1809.21 Q?.2@30275,1809.21 Q?.2@32585,1809.21 Q?.2@33135,1809.21 Q?.2@33680,1809.21 Q?.3@8365,1809.21 Q?.3@8910,1809.21 Q?.3@9460,1809.21 Q?.3@11770,1809.21 Q?.3@12320,1809.21 Q?.3@12865,1809.21 Q?.3@18800,1809.21 Q?.3@19345,1809.21 Q?.3@19890,1809.21 Q?.3@22205,1809.21 Q?.3@22750,1809.21 Q?.3@23295,1809.21 Q?.3@29780,1809.21 Q?.3@30325,1809.21 Q?.3@32635,1809.21 Q?.3@33185,1809.21 Q?.3@33730,1809.21 Q?.4@18850,2210.79 Q?.4@19395,2210.79 Q?.4@19940,2210.79 Q?.4@29280,2210.79 Q?.4@29830,2210.79 Q?.4@30375,2210.79 Q?.5@22305,1809.21 Q?.5@22850,1809.21 Q?.5@23395,1809.21 Q?.5@32735,1809.21 Q?.5@33285,1809.21 Q?.5@33830,1809.21 Q?.6@22355,1809.21 Q?.6@22900,1809.21 Q?.6@23445,1809.21 Q?.6@32785,1809.21 Q?.6@33335,1809.21 Q?.6@33880,1809.21 Q?.7@22405,1809.21 Q?.7@22950,1809.21 Q?.7@23495,1809.21 Q?.7@32835,1809.21 Q?.7@33385,1809.21 Q?.7@33930,1809.21 R?.1@7255,1465 R?.1@9830.63,1455 R?.1@10195,1465 R?.1@10545.63,1455 R?.1@10920.63,1455 R?.1@10945.63,3220 R?.1@11650,1465 R?.1@13310.63,1455 R?.1@14070,1465 R?.1@15360.63,1455 R?.1@16650.63,1455 R?.1@17015,1465 R?.1@17365.63,1455 R?.1@17735.63,1455 R?.1@17860,2390 R?.1@20130.63,1455 R?.1@20890,1465 R?.1@22180.63,1455 R?.1@23470.63,1455 R?.1@23835,1465 R?.1@24185.63,1455 R?.1@25290,1465 R?.1@28295,2390 R?.2@7325,1465 R?.2@7689.37,2380 R?.2@7884.37,2380 R?.2@8034.37,3220 R?.2@8084.37,2380 R?.2@10119.37,2380 R?.2@10265,1465 R?.2@10314.37,2380 R?.2@10805,1465 R?.2@11094.37,2380 R?.2@11289.37,2380 R?.2@11419.37,3220 R?.2@11489.37,2380 R?.2@11814.37,3220 R?.2@13025,1465 R?.2@14140,1465 R?.2@14880,1465 R?.2@17004.37,2380 R?.2@17085,1465 R?.2@17204.37,2380 R?.2@17399.37,2380 R?.2@17625,1465 R?.2@18119.37,2380 R?.2@18319.37,2380 R?.2@18514.37,2380 R?.2@19845,1465 R?.2@20354.37,2380 R?.2@20549.37,2380 R?.2@20749.37,2380 R?.2@20960,1465 R?.2@21524.37,2380 R?.2@21700,1465 R?.2@21724.37,2380 R?.2@21919.37,2380 R?.2@23905,1465 R?.2@24445,1465 R?.2@27439.37,2380 R?.2@27634.37,2380 R?.2@27834.37,2380 R?.2@28554.37,2380 R?.2@28749.37,2380 R?.2@30784.37,2380 R?.2@30984.37,2380 R?.2@31179.37,2380 R?.2@31959.37,2380 R?.2@32154.37,2380 R?.2@32354.37,2380 R?.2@37869.37,2380 R?.2@38069.37,2380 R?.2@38269.37,2380 U?.1@11872.32,1455 U?.1@18687.32,1455 U?.2@11872.32,1405 U?.2@18687.32,1405 U?.5@11872.32,1255 U?.5@18687.32,1255 U?.6@11872.32,1205 U?.6@25507.32,1205 U?.7 U?.10 U?.12 U?.13 U?.15@12237.68,1405 U?.15@19052.68,1405

## Text inside footprints (layer, text, board x,y; h text height)
D?: Top Overlay "+" at 24045,1455.02 h39.38 r90
D?: Top Overlay "+" at 22040,1455.02 h39.38 r90
D?: Top Overlay "+" at 17225,1455.02 h39.38 r90
D?: Top Overlay "+" at 15220,1455.02 h39.38 r90
D?: Top Overlay "+" at 10405,1455.02 h39.38 r90
D?: Top Overlay "+" at 8400,1455.02 h39.38 r90